# EAGLE board MainPart_Board (EAGLE 9.6.2)
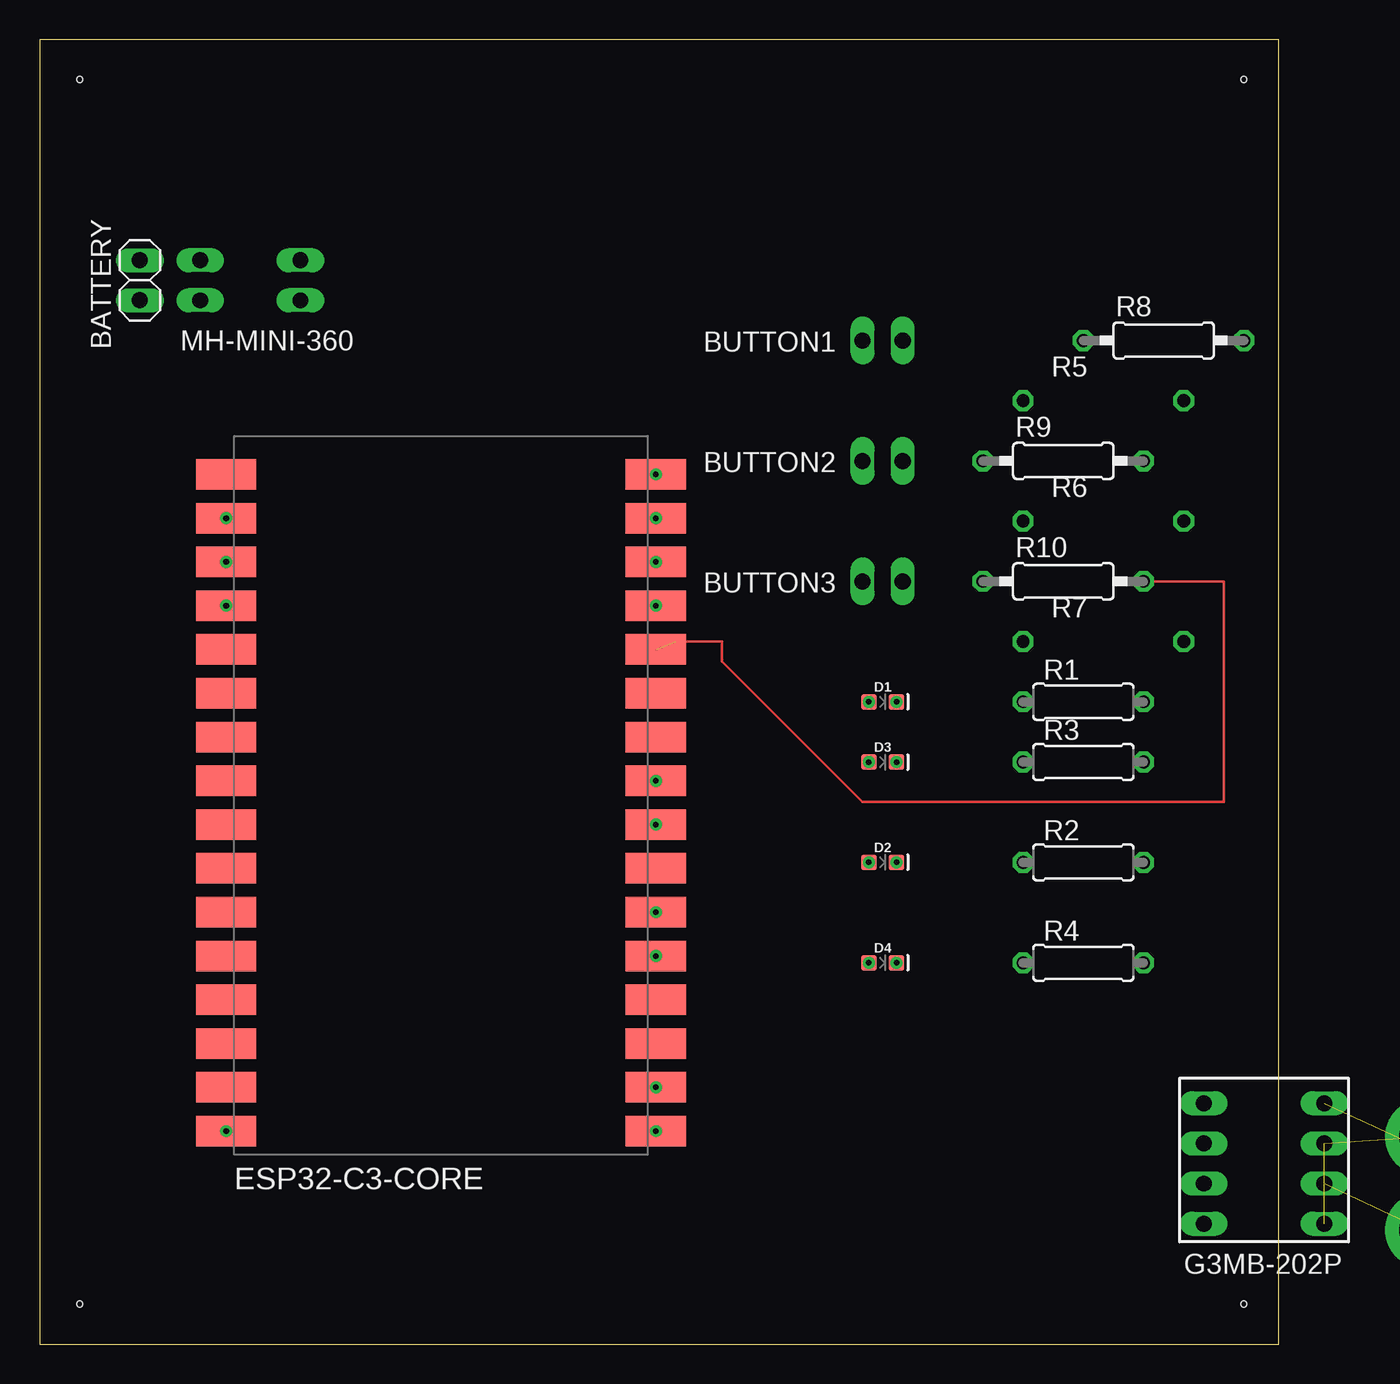
[diagram p0: board, top side]
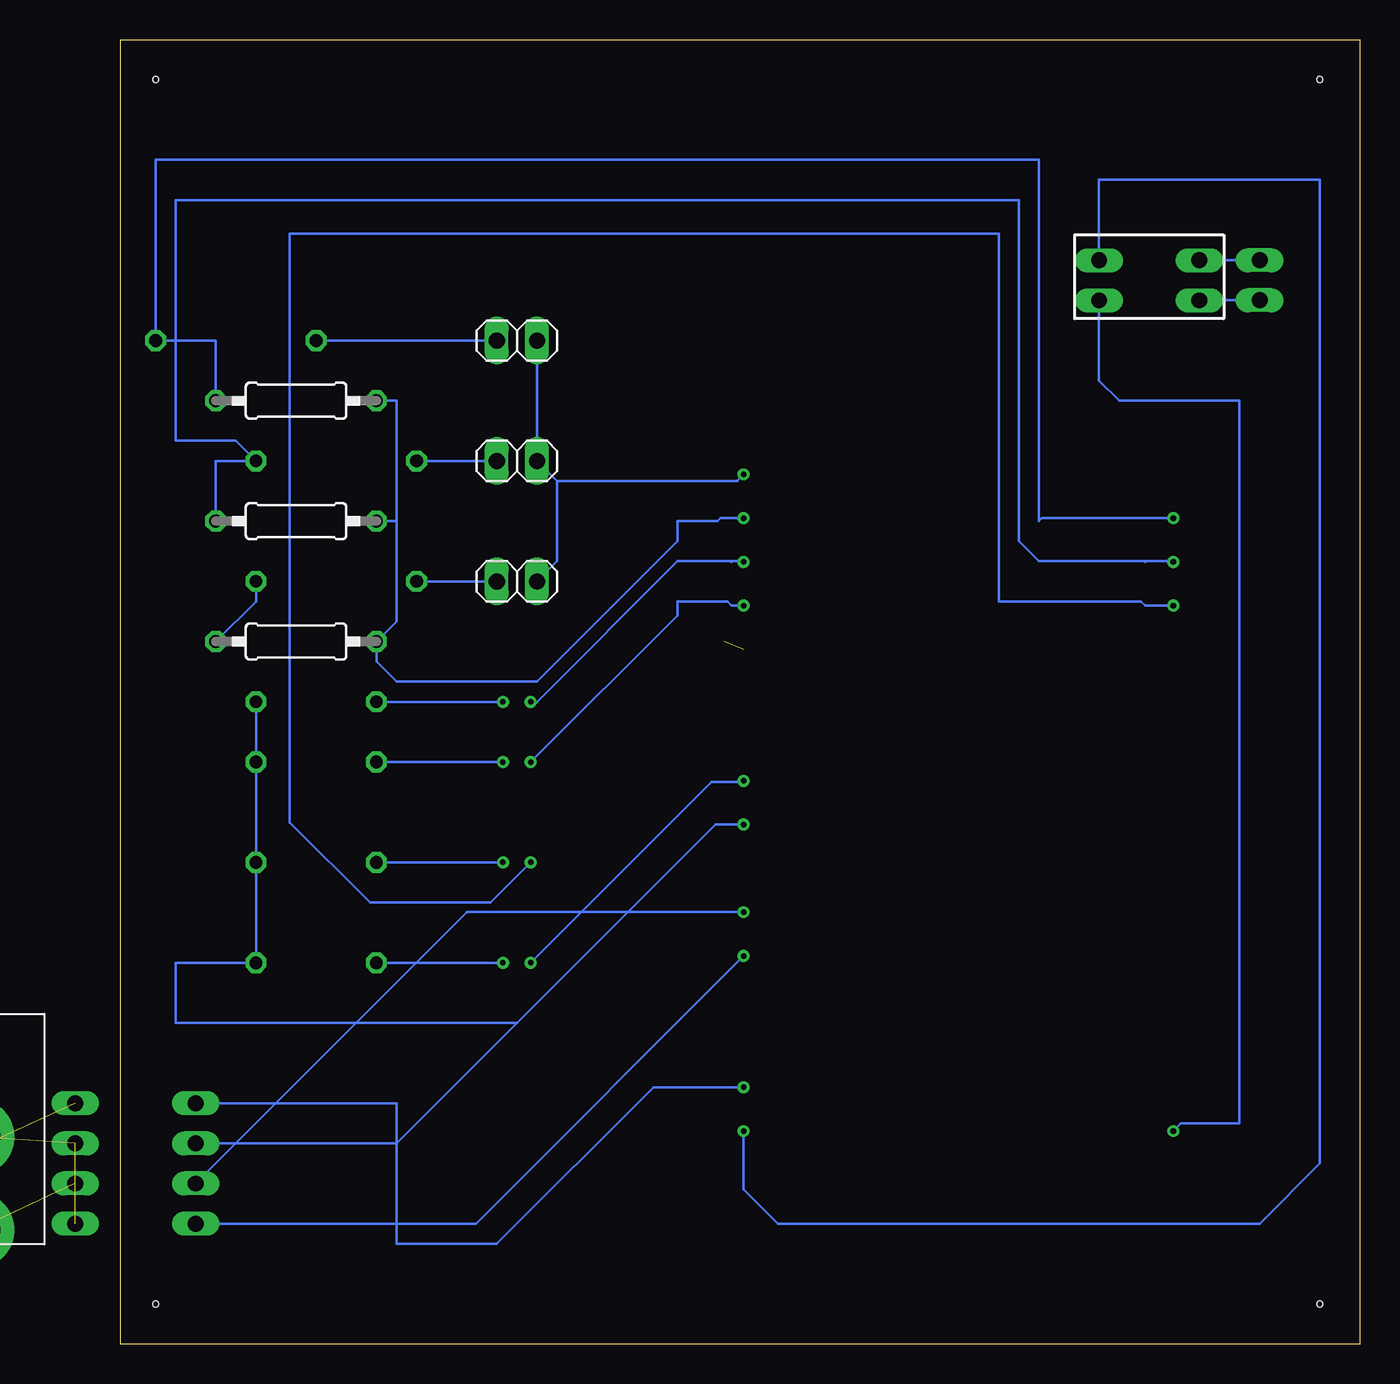
[diagram p1: board, bottom side, seen from below]

Size 78.41 x 82.54 mm. Coordinates in mm from the lower left corner, seen from the top.
Outline: 0,0 78.41,0 78.41,82.54 0,82.54 0,0
Copper layers (1*16): Top 0.035mm / dielectric 1.6mm / Bottom 0.035mm
Design rules "default *": minimum track width 6mil, minimum drill 0.35mm, track to track 6mil, track to pad 6mil, pad to pad 6mil, via to via 6mil, smd to smd 6mil, copper to edge 40mil, drill to drill 6mil, minimum pad ring 10mil, minimum via ring 8mil, stop-mask expansion 4mil, vias tented up to drill 0mil, thermal gap 10mil
Holes 0.35 mm at 2.54,2.54 76.2,2.54 2.54,80.01 76.2,80.01

## Footprints (pad centres in the part's own frame; a part is rotated, then mirrored left to right if it is on the bottom)
1X02 = drill 1.016 long: 1 -1.27,0; 2 1.27,0
LED-0603 = smd 1 x 1: A -0.877,0; C 0.877,0
ESP32-C3 = smd 3.81 x 1.93: 1 -6.73,23.28; 2 -6.73,20.51; 3 -6.73,17.74; 4 -6.73,14.97; 5 -6.73,12.2; 6 -6.73,9.43; 7 -6.73,6.66; 8 -6.73,3.89; 9 -6.73,1.12; 10 -6.73,-1.65; 11 -6.73,-4.42; 12 -6.73,-7.19; 13 -6.73,-9.96; 14 -6.73,-12.73; 15 -6.73,-15.5; 16 -6.73,-18.27; 17 -33.91,23.28; 18 -33.91,20.51; 19 -33.91,17.74; 20 -33.91,14.97; 21 -33.91,12.2; 22 -33.91,9.43; 23 -33.91,6.66; 24 -33.91,3.89; 25 -33.91,1.12; 26 -33.91,-1.65; 27 -33.91,-4.42; 28 -33.91,-7.19; 29 -33.91,-9.96; 30 -33.91,-12.73; 31 -33.91,-15.5; 32 -33.91,-18.27
OMRON-G3MB-202P-SSR = drill 1 long: A1 -1.27,5.08; A2 -1.27,0; B1 -1.27,2.54; B2 -1.27,-2.54; CH1 -8.89,0; CH2 -8.89,-2.54; DC+ -8.89,5.08; DC- -8.89,2.54
MH-MINI-360 = drill 1 long: IN+ -3.81,-2.54; IN- -3.81,0; OUT+ -10.16,-2.54; OUT- -10.16,0
PJ-102A = drill 3 pad 4.8: RING 0.1,-3.39; RING_SW -4.6,-6.29; TIP 0.1,-9.29
0207/7 = drill 0.813 octagon: 1 -3.81,0; 2 3.81,0
0207/10 = drill 0.813 octagon: 1 -5.08,0; 2 5.08,0

## Placement (x,y rotation side)
BATTERY  [1X02]  6.35,67.31 270 top
BUTTON1  [1X02]  53.34,63.5 0 bottom
BUTTON2  [1X02]  53.34,55.88 0 bottom
BUTTON3  [1X02]  53.34,48.26 0 bottom
D1  YELLOW  [LED-0603]  53.34,40.64 0 top
D2  RED  [LED-0603]  53.34,30.48 0 top
D3  GREEN  [LED-0603]  53.34,36.83 0 top
D4  BLUE  [LED-0603]  53.34,24.13 0 top
ESP32-C3-CORE  ESP32-C3  [ESP32-C3]  45.72,31.75 0 top
G3MB-202P  OMRON-G3MB-202P-SSR  [OMRON-G3MB-202P-SSR]  82.55,10.16 0 top
MH-MINI-360  MH-MINI-360  [MH-MINI-360]  6.35,68.58 0 bottom
MINI-JACK-2.5MM  2.1MMJACKTHM  [PJ-102A]  87.63,16.51 0 bottom  (outside the outline)
R1  220  [0207/7]  66.04,40.64 0 top
R2  470  [0207/7]  66.04,30.48 0 top
R3  68  [0207/7]  66.04,36.83 0 top
R4  2.2k  [0207/7]  66.04,24.13 0 top
R5  22k  [0207/10]  67.31,59.69 0 bottom
R6  22k  [0207/10]  67.31,52.07 0 bottom
R7  22k  [0207/10]  67.31,44.45 0 bottom
R8  100  [0207/10]  71.12,63.5 0 top
R9  100  [0207/10]  64.77,55.88 0 top
R10  100  [0207/10]  64.77,48.26 0 top

## Library data of the parts
BATTERY BUTTON1-BUTTON3 = pinhead
D1 = SparkFun-LED; PROD_ID: DIO-11230
D2 = SparkFun-LED; PROD_ID: DIO-16511
D3 = SparkFun-LED; PROD_ID: DIO-00821
D4 = SparkFun-LED; PROD_ID: DIO-08575
ESP32-C3-CORE G3MB-202P MH-MINI-360 MINI-JACK-2.5MM = Library_Agata.Sobczyk
R1-R10 = rcl; SPICEPREFIX: R

## Nets
GND: ESP32-C3-CORE.9 G3MB-202P.DC- R1.2 R2.2 R3.2 R4.2
N$1: BATTERY.1 MH-MINI-360.IN-
N$2: BUTTON1.1 R8.1
N$3: BATTERY.2 MH-MINI-360.IN+
N$4: ESP32-C3-CORE.32 MH-MINI-360.OUT+
N$5: ESP32-C3-CORE.16 MH-MINI-360.OUT-
N$6: ESP32-C3-CORE.12 G3MB-202P.CH2
N$7: ESP32-C3-CORE.15 G3MB-202P.DC+
N$8: BUTTON1.2 BUTTON2.2 BUTTON3.2 ESP32-C3-CORE.1
N$10: G3MB-202P.B1 G3MB-202P.B2 MINI-JACK-2.5MM.RING
N$11: G3MB-202P.A1 MINI-JACK-2.5MM.RING_SW
N$12: G3MB-202P.A2 MINI-JACK-2.5MM.TIP
N$13: D4.C R4.1
N$14: D3.C R3.1
N$15: D2.C R2.1
N$16: D1.C R1.1
N$17: D3.A ESP32-C3-CORE.4
N$19: D2.A ESP32-C3-CORE.20
N$23: BUTTON2.1 R9.1
N$24: ESP32-C3-CORE.5 R7.1 R10.2
N$25: ESP32-C3-CORE.19 R6.1 R9.2
N$26: ESP32-C3-CORE.18 R5.1 R8.2
N$27: ESP32-C3-CORE.2 R5.2 R6.2 R7.2
N$29: D4.A ESP32-C3-CORE.8
N$30: D1.A ESP32-C3-CORE.3
N$32: BUTTON3.1 R10.1
N$38: ESP32-C3-CORE.11 G3MB-202P.CH1

## Tracks (layer width: path | path; a pad name or v marks a point on that pad's centre or on a via)
GND  (via drill 0.35)
  Bottom 0.152: R1.2 R3.2 R2.2 R4.2 74.93,24.13 74.93,20.32 53.34,20.32 | 72.91,12.7 G3MB-202P.DC- 60.96,12.7 53.34,20.32 | ESP32-C3-CORE.9 40.79,32.87 53.34,20.32
  other vias: 38.99,32.87
N$1
  Bottom 0.152: BATTERY.1 MH-MINI-360.IN-
N$2
  Bottom 0.152: BUTTON1.1 R8.1
N$3
  Bottom 0.152: BATTERY.2 MH-MINI-360.IN+
N$4  (via drill 0.35)
  Bottom 0.152: MH-MINI-360.OUT+ 16.51,60.96 15.24,59.69 7.62,59.69 7.62,13.97 11.32,13.97 ESP32-C3-CORE.32
  other vias: 11.81,13.48
N$5  (via drill 0.35)
  Bottom 0.152: ESP32-C3-CORE.16 38.99,9.78 36.83,7.62 6.35,7.62 2.54,11.43 2.54,73.66 16.51,73.66 MH-MINI-360.OUT-
  other vias: 38.99,13.48
N$6  (via drill 0.35)
  Bottom 0.152: ESP32-C3-CORE.12 55.93,7.62 G3MB-202P.CH2
  other vias: 38.99,24.56
N$7  (via drill 0.35)
  Bottom 0.152: ESP32-C3-CORE.15 44.71,16.25 54.61,6.35 60.96,6.35 60.96,15.24 G3MB-202P.DC+
  other vias: 38.99,16.25
N$8  (via drill 0.35)
  Bottom 0.152: BUTTON1.2 BUTTON2.2 50.8,54.61 | 50.8,54.61 39.37,54.61 39.37,54.65 ESP32-C3-CORE.1 | BUTTON3.2 50.8,49.53 50.8,54.61
  other vias: 38.99,55.03
N$10  (2 unrouted)
N$11  (1 unrouted)
N$12  (1 unrouted)
N$13  (via drill 0.35)
  Bottom 0.152: D4.C R4.1
  other vias: 54.22,24.13
N$14  (via drill 0.35)
  Bottom 0.152: D3.C R3.1
  other vias: 54.22,36.83
N$15  (via drill 0.35)
  Bottom 0.152: D2.C R2.1
  other vias: 54.22,30.48
N$16  (via drill 0.35)
  Bottom 0.152: D1.C R1.1
  other vias: 54.22,40.64
N$17  (via drill 0.35)
  Bottom 0.152: D3.A 43.18,46.11 43.18,46.99 40.02,46.99 39.75,46.72 ESP32-C3-CORE.4
  other vias: 52.46,36.83 38.99,46.72
N$19  (via drill 0.35)
  Bottom 0.152: D2.A 55,27.94 62.62,27.94 67.7,33.02 67.7,70.24 22.86,70.24 22.86,46.99 13.86,46.99 13.59,46.72 ESP32-C3-CORE.20
  other vias: 52.46,30.48 11.81,46.72
N$23
  Bottom 0.152: BUTTON2.1 R9.1
N$24  (1 unrouted)
  Top 0.152: R10.2 74.93,48.26 74.93,34.29 52.07,34.29 43.18,43.18 43.18,44.45 40.25,44.45
  Bottom 0.152: R10.2 69.85,46.99 R7.1
N$25  (via drill 0.35)
  Bottom 0.152: R6.1 72.39,55.88 R9.2 71.12,57.15 74.93,57.15 74.93,72.39 21.59,72.39 21.59,50.8 20.32,49.53 13.63,49.53 | 13.59,49.49 13.63,49.53 | ESP32-C3-CORE.19 11.85,49.53 13.63,49.53
  other vias: 11.81,49.49
N$26  (via drill 0.35)
  Bottom 0.152: ESP32-C3-CORE.18 20.13,52.26 20.32,52.07 20.32,74.93 76.2,74.93 R8.2 72.39,63.5 R5.1
  other vias: 11.81,52.26
N$27  (via drill 0.35)
  Bottom 0.152: 60.96,52.07 60.96,45.72 R7.2 62.23,43.18 60.96,41.91 52.07,41.91 43.18,50.8 43.18,52.07 40.64,52.07 40.45,52.26 ESP32-C3-CORE.2 | 60.96,52.07 R6.2 | 60.96,52.07 60.96,59.69 R5.2
  other vias: 38.99,52.26
N$29  (via drill 0.35)
  Bottom 0.152: D4.A 41.03,35.56 39.37,35.56 39.29,35.64 ESP32-C3-CORE.8
  other vias: 52.46,24.13 38.99,35.64
N$30  (via drill 0.35)
  Bottom 0.152: D1.A 52.07,40.64 43.18,49.53 39.79,49.53 | 39.75,49.49 39.79,49.53 | ESP32-C3-CORE.3 39.03,49.53 39.79,49.53
  other vias: 52.46,40.64 38.99,49.49
N$32
  Bottom 0.152: BUTTON3.1 R10.1
N$38  (via drill 0.35)
  Bottom 0.152: ESP32-C3-CORE.11 56.49,27.33 G3MB-202P.CH1
  other vias: 38.99,27.33